# Altium PCB expansion.PcbDoc
Units mil, origin at the board's own origin, x right, y up, seen from the top; angles counter-clockwise.
Board outline 912.08 x 872.97 mil, 2 copper layers (Top Layer, Bottom Layer), stack 18.8 mil thick; 25 components, 8 nets, 152 pads, 0 vias.
Unrouted connection lines stored in the file: 114.
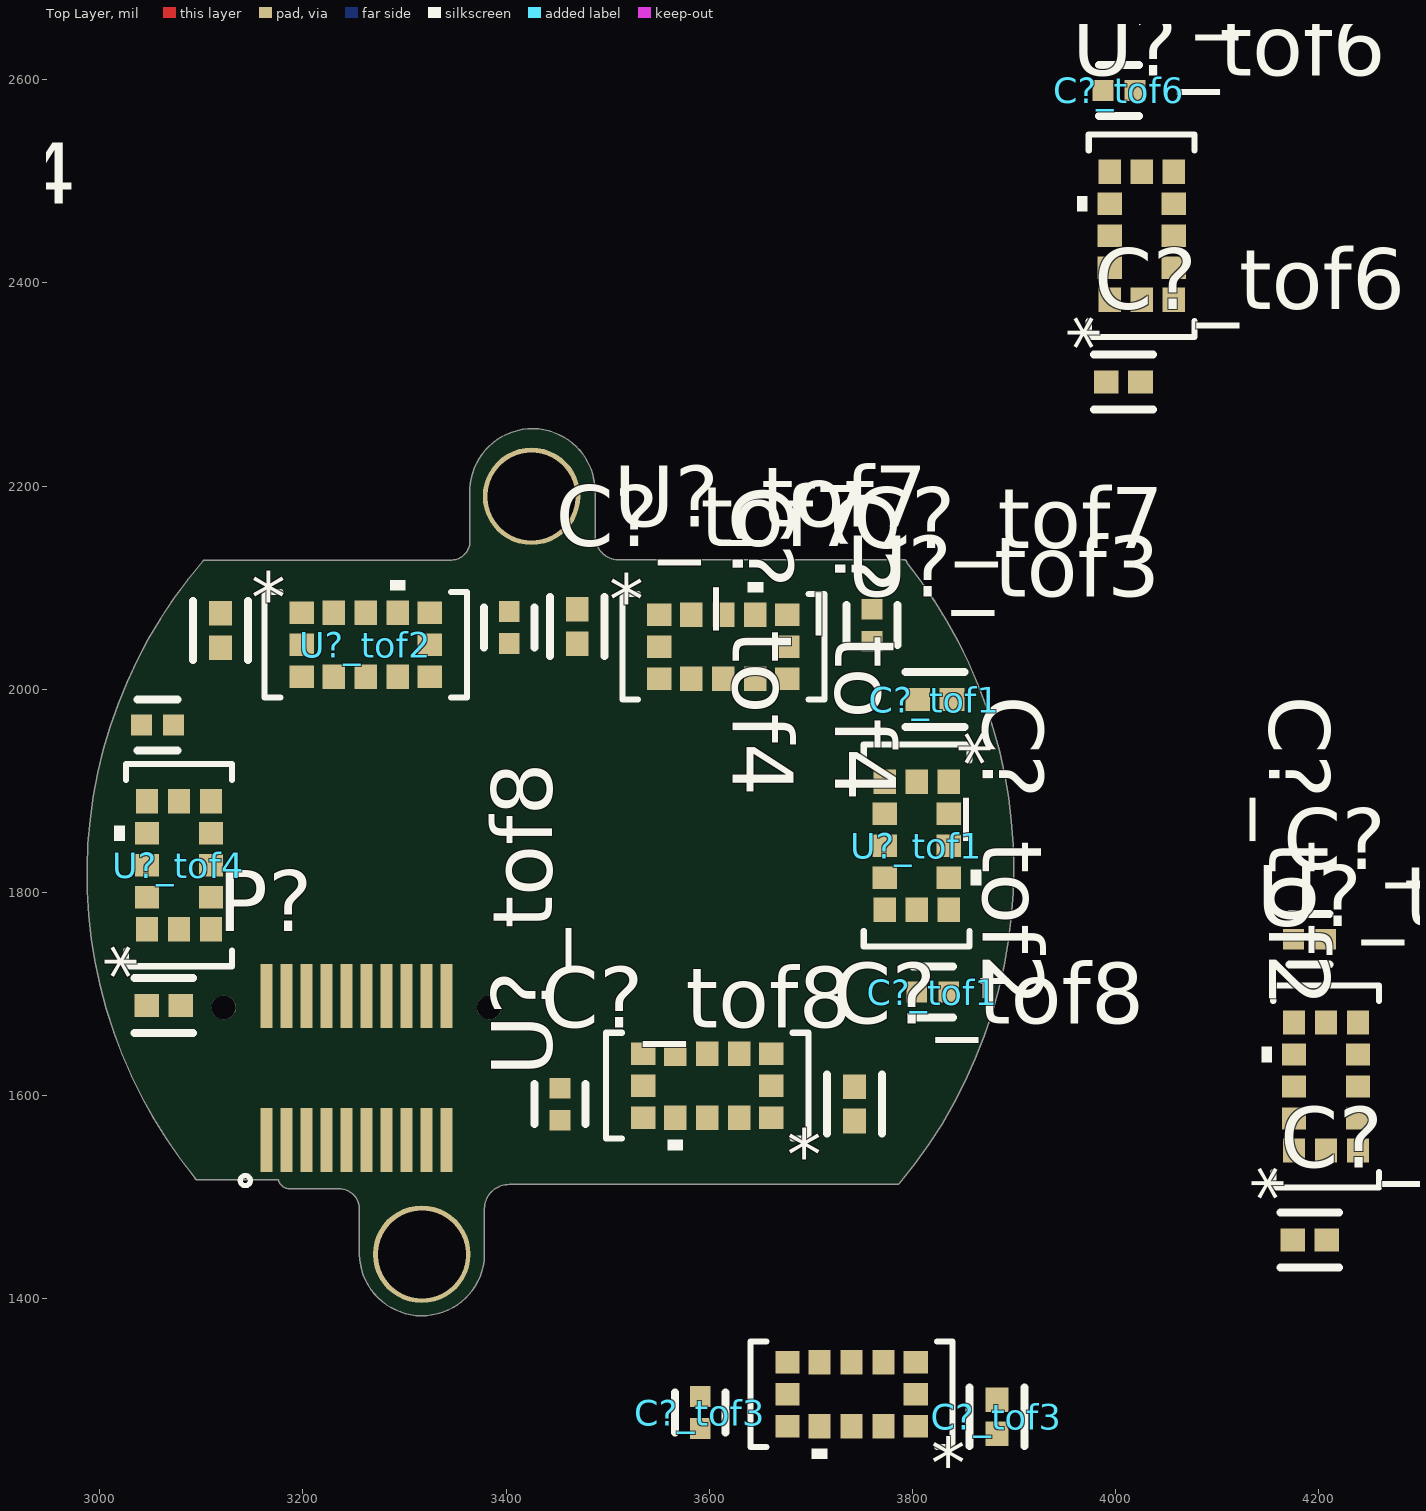
[diagram p0: Top Layer view]
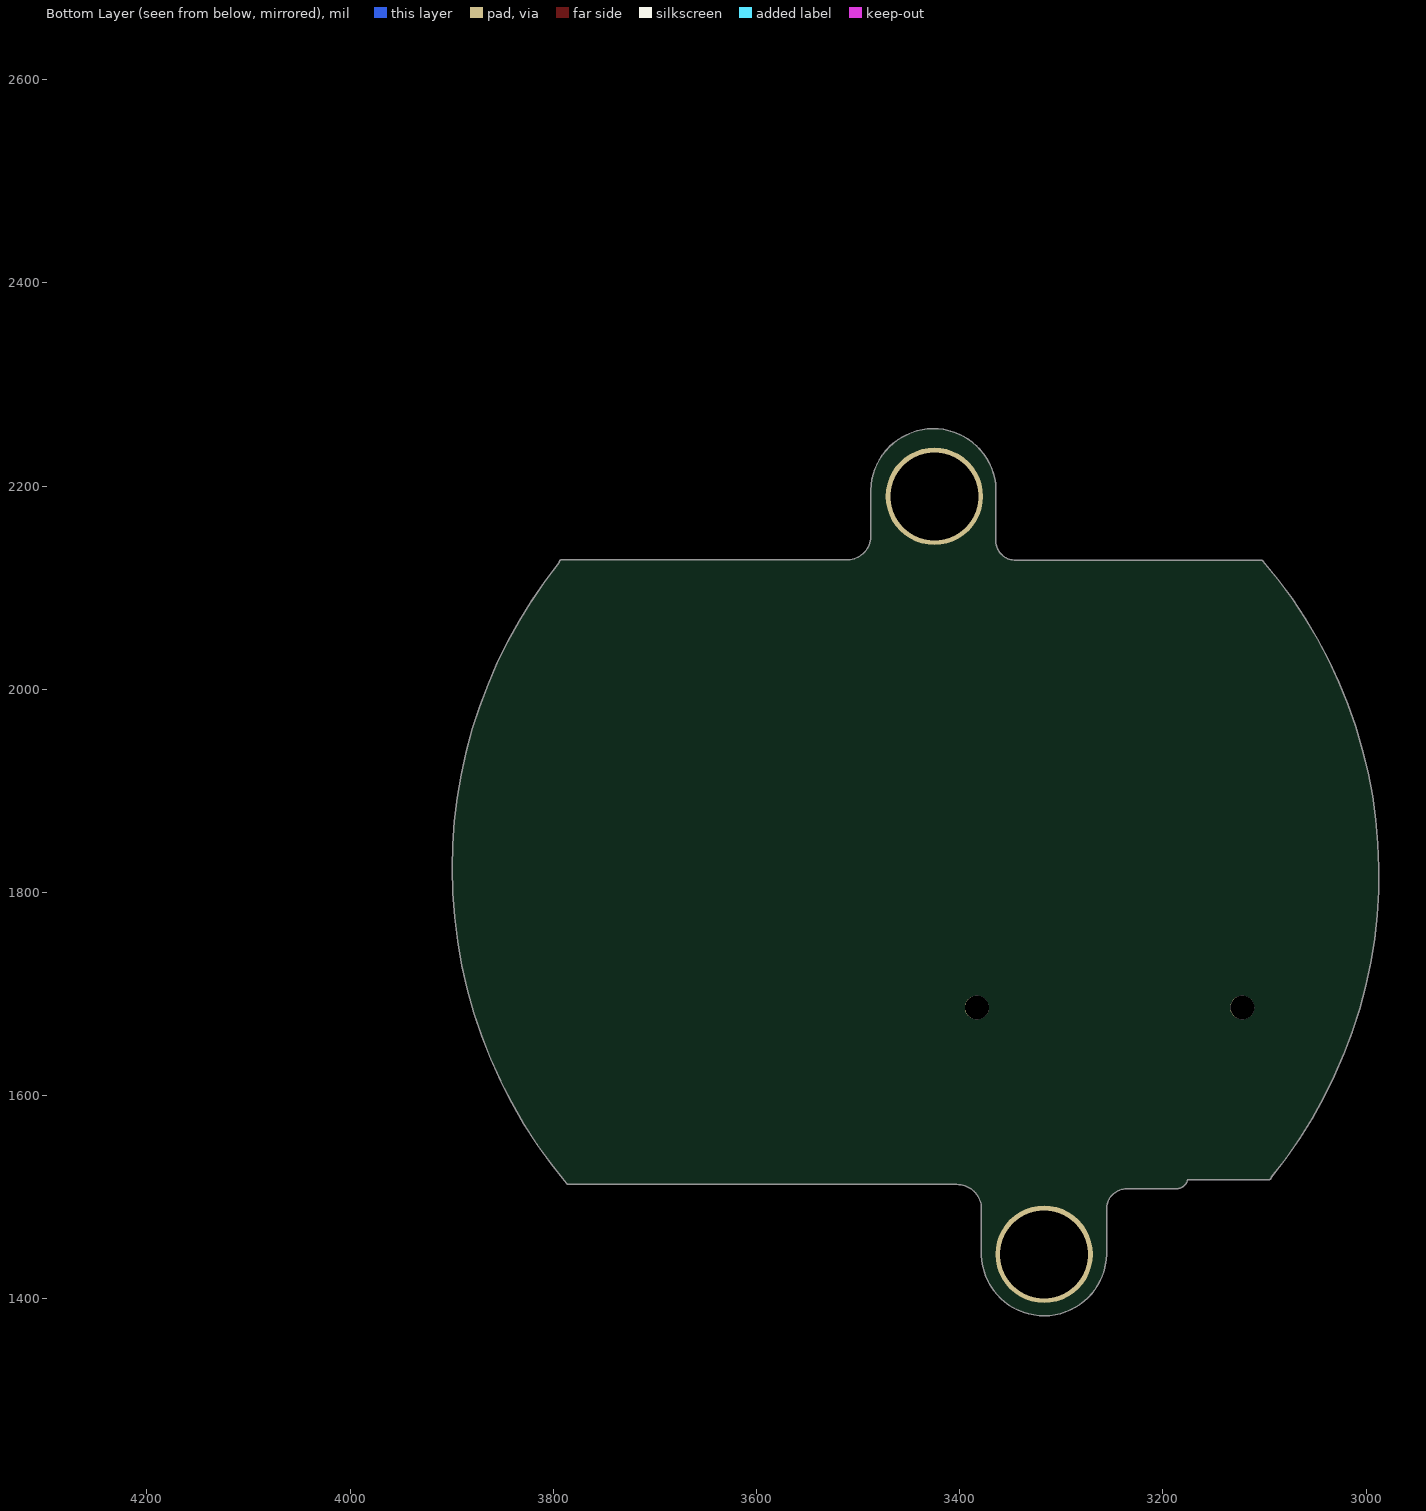
[diagram p1: Bottom Layer view, seen from below]

## Layer stack, top to bottom
Top Solder: solder mask 0.4, Solder Resist, Dk 3.5
Top Layer: signal copper 1.4
Dielectric 1: core 3, FR-4, Dk 4.2
Dielectric 3: prepreg 5, Dk 4.2
Dielectric 2: core 8, Dk 4.2
Bottom Layer: signal copper 1.4
Bottom Solder: solder mask 0.4, Solder Resist, Dk 3.5

## Board outline
3187,1508.48 3234,1508.48 ccw(c3234,1511) 3234.17,1508.49 cw(c3235.55,1488.45) 3255.59,1489.91 3255.59,1444 ccw(c3258.11,1444) 3255.6,1443.88 cw(c3317.16,1445.01) 3255.59,1444.02 cw(c3258.11,1444.06) 3255.59,1444.06 3255.6,1443.88 ccw(c3317.16,1445.01) 3378.69,1442.78 ccw(c3376.18,1443) 3378.7,1443 3378.7,1488.99 cw(c3402.69,1488.69) 3402.97,1512.68 ccw(c3403,1515.2) 3403,1512.68 3785,1512.68 ccw(c3785,1515.2) 3787.04,1513.73 ccw(c3785.23,1515.48) 3787.16,1513.86 ccw(c3416.39,1823.74) 3899.61,1823.74 ccw(c3416.39,1823.74) 3794.27,2124.92 ccw(c3791.76,2125) 3794.27,2125 ccw(c3791.76,2125) 3791.76,2127.51 3512,2127.51 ccw(c3512,2125) 3511.88,2127.51 cw(c3511.01,2150.99) 3487.53,2150.1 ccw(c3485.02,2150) 3487.51,2150.35 3487.51,2195 ccw(c3484.99,2195) 3487.46,2195.48 ccw(c3485,2196) 3487.51,2196 ccw(c3485,2196) 3487.51,2196.04 ccw(c3425.95,2195.05) 3364.42,2197.3 ccw(c3366.92,2197) 3364.41,2197 3364.41,2144.08 ccw(c3366.92,2144.08) 3364.43,2143.72 cw(c3345.4,2146.4) 3343.3,2127.3 cw(c3345.4,2146.4) 3343.28,2127.3 3343.3,2127.3 ccw(c3343,2124.8) 3343,2127.32 3103.61,2127.29 ccw(c3103.61,2124.78) 3101.71,2126.42 ccw(c3460.68,1818.11) 3093.33,1519.84 ccw(c3095.84,1520) 3095.84,1517.48 3175.76,1517.48 ccw(c3187,1520)

## Design rules (kind name [scope] priority, off if disabled: settings)
Clearance [All] p1: gap=5 ignorepadtopadclearanceinfootprint=FALSE except(0: Arc-Hole Track-Hole SMDPad-Hole THPad-Hole Via-Hole Fill-Hole Poly-Hole Region-Hole Text-Hole; 6: Track-SMDPad)
MinimumSolderMaskSliver [All] p1 off: minsoldermaskwidth=5
PolygonConnect [All] p1: connectstyle=Direct reliefconductorwidth=10 reliefentries=4 polygonreliefangle="90 Angle" airgapwidth=10
RoomDefinition tof6 [InComponentClass('tof6')] p1: confinementstyle=ConfineIn formatcopy=TRUE lockcomponents=FALSE outline 3941.49,2267.5 4124.49,2267.5 4124.49,2679.5 3941.49,2679.5
RoomDefinition tof7 [InComponentClass('tof7')] p2: confinementstyle=ConfineIn formatcopy=TRUE lockcomponents=FALSE outline 3398,2125.87 3398,1922.87 3846.87,1922.87 3846.87,2125.87
RoomDefinition tof8 [InComponentClass('tof8')] p3: confinementstyle=ConfineIn formatcopy=TRUE lockcomponents=FALSE outline 3792,1526 3792,1695 3365,1695 3365,1526
RoomDefinition tof5 [InComponentClass('tof5')] p4: confinementstyle=ConfineIn formatcopy=TRUE lockcomponents=FALSE outline 4123,1389 4313,1389 4313,1842.13 4123,1842.13
RoomDefinition tof4 [InComponentClass('tof4')] p5: confinementstyle=ConfineIn formatcopy=TRUE lockcomponents=FALSE outline 3003,1653 3165,1653 3165,2001 3003,2001
RoomDefinition tof3 [InComponentClass('tof3')] p6: confinementstyle=ConfineIn formatcopy=TRUE lockcomponents=FALSE outline 3922,1232.13 3922,1391.13 3561.75,1391.13 3561.75,1232.13
RoomDefinition tof2 [InComponentClass('tof2')] p7: confinementstyle=ConfineIn formatcopy=TRUE lockcomponents=FALSE outline 3074,2116 3074,1952 3484.87,1952 3484.87,2116
RoomDefinition tof1 [InComponentClass('tof1')] p8: confinementstyle=ConfineIn formatcopy=TRUE lockcomponents=FALSE outline 3876,2024 3712,2024 3712,1663 3876,1663
RoomDefinition expansion [InComponentClass('expansion')] p9: confinementstyle=ConfineIn formatcopy=TRUE lockcomponents=FALSE outline 0,0 2000,0 2000,1000 0,1000
RoutingVias [All] p1: holewidth=8 width=18 viastyle="Through Hole" minholewidth=8 minwidth=18 maxholewidth=28 maxwidth=50
SilkToSilkClearance [All] p1 off: silktosilkclearance=10
SilkToSolderMaskClearance [IsPad] p1 off: minsilkscreentomaskgap=10 clearancetoexposedcopper=TRUE
SolderMaskExpansion [All] p1: expansion=4 istentingtop=FALSE
Width [All] p1: maxlimit=50 minlimit=5 preferedwidth=5
27 further rules are at their usual default settings.

## Classes and differential pairs
component class tof8: C?_tof8 U?_tof8
component class tof7: C?_tof7 U?_tof7
component class tof6: C?_tof6 U?_tof6
component class tof5: C?_tof5 U?_tof5
channel class VL53L01: tof1 tof2 tof3 tof4 tof5 tof6 tof7 tof8
component class tof4: C?_tof4 U?_tof4
component class tof3: C?_tof3 U?_tof3
component class tof2: C?_tof2 U?_tof2
component class tof1: C?_tof1 U?_tof1
component class expansion: P? U?

## Components (designator, comment, footprint, x,y, rotation, side; value= is the part's Value field where it differs from the comment)
C?_tof1 "C0402C104K8PACTU" FP-C0402-BB-MFG 3820,1702 r180 top value="0.10 μF" (schematic designator C?)
C?_tof1 "GRM155R60J475ME47D" FP-GRM155-0_1-IPC_B 3822,1990 r180 top (schematic designator C?)
C?_tof2 "C0402C104K8PACTU" FP-C0402-BB-MFG 3403,2061 r270 top value="0.10 μF" (schematic designator C?)
C?_tof2 "GRM155R60J475ME47D" FP-GRM155-0_1-IPC_B 3119,2058 r270 top (schematic designator C?)
C?_tof3 "C0402C104K8PACTU" FP-C0402-BB-MFG 3591,1288.13 r90 top value="0.10 μF" (schematic designator C?)
C?_tof3 "GRM155R60J475ME47D" FP-GRM155-0_1-IPC_B 3883,1284.13 r90 top (schematic designator C?)
C?_tof4 "C0402C104K8PACTU" FP-C0402-BB-MFG 3057,1965 r0 top value="0.10 μF" (schematic designator C?)
C?_tof4 "GRM155R60J475ME47D" FP-GRM155-0_1-IPC_B 3063,1689 r0 top (schematic designator C?)
C?_tof5 "C0402C104K8PACTU" FP-C0402-BB-MFG 4190.75,1754 r0 top value="0.10 μF" (schematic designator C?)
C?_tof5 "GRM155R60J475ME47D" FP-GRM155-0_1-IPC_B 4191,1458 r0 top (schematic designator C?)
C?_tof6 "C0402C104K8PACTU" FP-C0402-BB-MFG 4003.24,2589.5 r0 top value="0.10 μF" (schematic designator C?)
C?_tof6 "GRM155R60J475ME47D" FP-GRM155-0_1-IPC_B 4007.49,2302.62 r0 top (schematic designator C?)
C?_tof7 "GRM155R60J475ME47D" FP-GRM155-0_1-IPC_B 3470,2061.87 r270 top (schematic designator C?)
C?_tof7 "C0402C104K8PACTU" FP-C0402-BB-MFG 3760,2063.12 r270 top value="0.10 μF" (schematic designator C?)
C?_tof8 "C0402C104K8PACTU" FP-C0402-BB-MFG 3453,1591.75 r90 top value="0.10 μF" (schematic designator C?)
C?_tof8 "GRM155R60J475ME47D" FP-GRM155-0_1-IPC_B 3743,1592 r90 top (schematic designator C?)
P? "CONN HEADER 20POS" "DF12 20 POS" 3311,1633 r0 top
U?_tof1 "VL53L1CBV0FY/1" QFN_BV0FY/1_STM-M 3804,1846.25 r270 top (schematic designator U?)
U?_tof2 "VL53L1CBV0FY/1" QFN_BV0FY/1_STM-M 3261.87,2044 r0 top (schematic designator U?)
U?_tof3 "VL53L1CBV0FY/1" QFN_BV0FY/1_STM-M 3740,1306.13 r180 top (schematic designator U?)
U?_tof4 "VL53L1CBV0FY/1" QFN_BV0FY/1_STM-M 3078,1827 r90 top (schematic designator U?)
U?_tof5 "VL53L1CBV0FY/1" QFN_BV0FY/1_STM-M 4207,1609.13 r90 top (schematic designator U?)
U?_tof6 "VL53L1CBV0FY/1" QFN_BV0FY/1_STM-M 4025.49,2446.5 r90 top (schematic designator U?)
U?_tof7 "VL53L1CBV0FY/1" QFN_BV0FY/1_STM-M 3613.87,2041.87 r0 top (schematic designator U?)
U?_tof8 "VL53L1CBV0FY/1" QFN_BV0FY/1_STM-M 3598,1610 r180 top (schematic designator U?)

## Footprints (in the part's own frame and the unit in brackets; to place one, negate y for a bottom-side part, rotate by r counter-clockwise, add the part's x,y. Pads: shape width x height; smd on the part's side, far side on the other; paste and mask are expansions set on the pad)
"DF12 20 POS" [mm]
  round 0.6 hole 0.6: 1(-4.801,1.366) 1(1.836,1.365)
  rect 0.3x1.6 smd mask+0.07: 1(-3.73,-1.947) 2(-3.73,1.653) 3(-3.229,-1.947) 4(-3.229,1.653) 5(-2.729,-1.947) 6(-2.729,1.653) 7(-2.23,-1.947) 8(-2.229,1.653) 9(-1.73,-1.947) 10(-1.73,1.653) 11(-1.23,-1.947) 12(-1.23,1.653) 13(-0.73,-1.947) 14(-0.73,1.653) 15(-0.236,-1.947) 16(-0.236,1.653) 17(0.264,-1.947) 18(0.265,1.653) 19(0.764,-1.947) 20(0.765,1.653)
  silkscreen extent -4.39,-3.09 -4.13,-2.83, body extent -5.12,-2.44 2.08,2.16, height 3.3
FP-C0402-BB-MFG [mm]
  rect 0.52x0.52 smd paste+0 mask+0: 1(-0.4,0) 2(0.4,0)
  silkscreen extent -0.5,-0.64 0.5,0.64, body extent -0.8,-0.4 0.8,0.4, height 0.25
FP-GRM155-0_1-IPC_B [mil]
  rect 24.23x22.54 smd paste+0 mask+0: 1(-16.87,0) 2(16.87,0)
  silkscreen extent -29,-27 29,27, body extent -35,-17 35,17, height 10
QFN_BV0FY/1_STM-M [mil]
  rect 24x22 smd paste+0 mask+0: 1(-63,31.5) 5(63,31.5) 6(63,0) 7(63,-31.5) 11(-63,-31.5) 12(-63,0)
  rect 22x24 smd paste+0 mask+0: 2(-31.5,31.49) 3(0,31.49) 4(31.5,31.49) 8(31.5,-31.49) 9(0,-31.49) 10(-31.5,-31.49)
  silkscreen extent -100,-52 100,63, body extent -94,-47 94,47, height 63

## Part data
C?_tof1 C?_tof2 C?_tof3 C?_tof4 C?_tof5 C?_tof6 C?_tof7 C?_tof8: library part CMP-2008-02046-2, "CAP CER 0.1UF 10V X5R 0402", Capacitance="0.10 μF", Manufacturer=Kemet, Package=C0402-BB, Temperature="-55°C to +125°C", Temperature Characteristic=X5R, Temperature Coefficient=15%, Temperature Range High=+125°C, Temperature Range Low=-55°C, Tolerance=0.1, Voltage Rating="10 V", Automotive=No, Category=Cap, ComponentLink2Description=Datasheet, ComponentLink2URL=https://content.kemet.com/datasheets/KEM_C1002_X7R_SMD.pdf, Device Class L1="Passive Components", Device Class L2=Capacitors, Device Class L3="Ceramic Capacitors", Digikey Description="CAP CER 0.1UF 10V X5R 0402", Height=0.55mm, Ipc Land Pattern Name=CAPC10050X50, Lead Free=Yes, Manufacturer Part Number=C0402C104K8PACTU, Material=Ceramic, Mouser Description="Capacitor 100 nF 10 VDC 0402", Octopart=https://octopart.com/c0402c104k8pactu-kemet-140039, RoHS=TRUE
C?_tof1 C?_tof2 C?_tof3 C?_tof4 C?_tof5 C?_tof6 C?_tof7 C?_tof8: library part CMP-2008-04549-2, "Chip Multilayer Ceramic Capacitors for General Purpose, 0402, 4.7uF, X5R, 15%, 20%, 6.3V", Capacitance=4.7uF, Case Code (Imperial)=0402, Case Code (Metric)=1005, Dielectric=X5R, Max Operating Temperature=85°C, Min Operating Temperature=-55°C, Package Quantity=10000, Tolerance=20%, Voltage=6.3V, Case/Package=0402, Contact Plating=Tin, Depth=0.5mm, Height=0.5mm, Lead Free="Lead Free", Length=1mm, Mount="Surface Mount", Packaging="Tape and Reel", REACH SVHC="No SVHC", Termination=SMD/SMT, Thickness=0.022inch, Voltage Rating=6.3V, Voltage Rating (DC)=6.3V, Weight=0.000212oz, Width=0.02inch
P?: digikey part number=H11743CT-ND, Manufacturer="Hirose Electric Co Ltd", Manufacturer Part Number=DF12D(4.0)-20DP-0.5V(81), Supplier 1=Digi-Key, Supplier Part Number 1=H11743CT-ND
U?_tof1 U?_tof2 U?_tof3 U?_tof4 U?_tof5 U?_tof6 U?_tof7 U?_tof8: "No Description Available", Mfr_Name=STMicroelectronics, Copyright="Copyright (C) 2022 Ultra Librarian. All rights reserved.", Manufacturer_Part_Number=VL53L1CBV0FY/1, RefDes=RefDes, Type=DEV

## Free pads (board coordinates)
  round 96 hole 86.61: 1(3317,1444) 1(3425,2190)

## Nets (pads, with @x,y where several pads share a name; then routed paths per layer and width w, separated by ;. In a path a pad name is that pad's centre, name@x,y a point inside that pad or via, vN(x,y) a via of type N, cw(c..) or ccw(c..) an arc to the next point about the centre after c; other vN are vias at no path point)
5V: P?.2
GND: C?_tof1.2 C?_tof2.2 C?_tof3.2 C?_tof4.2 C?_tof5.2 C?_tof6.2 C?_tof7.2 C?_tof8.2 P?.20 U?_tof1.2 U?_tof1.3 U?_tof1.4 U?_tof1.6 U?_tof1.12 U?_tof2.2 U?_tof2.3 U?_tof2.4 U?_tof2.6 U?_tof2.12 U?_tof3.2 U?_tof3.3 U?_tof3.4 U?_tof3.6 U?_tof3.12 U?_tof4.2 U?_tof4.3 U?_tof4.4 U?_tof4.6 U?_tof4.12 U?_tof5.2 U?_tof5.3 U?_tof5.4 U?_tof5.6 U?_tof5.12 U?_tof6.2 U?_tof6.3 U?_tof6.4 U?_tof6.6 U?_tof6.12 U?_tof7.2 U?_tof7.3 U?_tof7.4 U?_tof7.6 U?_tof7.12 U?_tof8.2 U?_tof8.3 U?_tof8.4 U?_tof8.6 U?_tof8.12
RESET: P?.1
SCL: P?.9 U?_tof1.10 U?_tof2.10 U?_tof3.10 U?_tof4.10 U?_tof5.10 U?_tof6.10 U?_tof7.10 U?_tof8.10
SDA: P?.7 U?_tof1.9 U?_tof2.9 U?_tof3.9 U?_tof4.9 U?_tof5.9 U?_tof6.9 U?_tof7.9 U?_tof8.9
SWCLK: P?.3
SWDIO: P?.5
VCC: C?_tof1.1 C?_tof2.1 C?_tof3.1 C?_tof4.1 C?_tof5.1 C?_tof6.1 C?_tof7.1 C?_tof8.1 P?.11 U?_tof1.1 U?_tof1.5 U?_tof1.11 U?_tof2.1 U?_tof2.5 U?_tof2.11 U?_tof3.1 U?_tof3.5 U?_tof3.11 U?_tof4.1 U?_tof4.5 U?_tof4.11 U?_tof5.1 U?_tof5.5 U?_tof5.11 U?_tof6.1 U?_tof6.5 U?_tof6.11 U?_tof7.1 U?_tof7.5 U?_tof7.11 U?_tof8.1 U?_tof8.5 U?_tof8.11
pads on no net: P?.4 P?.6 P?.8 P?.10 P?.12 P?.13 P?.14 P?.15 P?.16 P?.17 P?.18 P?.19 U?_tof1.7 U?_tof1.8 U?_tof2.7 U?_tof2.8 U?_tof3.7 U?_tof3.8 U?_tof4.7 U?_tof4.8 U?_tof5.7 U?_tof5.8 U?_tof6.7 U?_tof6.8 U?_tof7.7 U?_tof7.8 U?_tof8.7 U?_tof8.8

## Silkscreen, mask and mechanical layers (free items; w line width, h text height)
Mechanical 1:
  lines w4: 3095.84,1520 3178,1520 ccw(c3187,1520) 3187,1511 3234,1511 cw(c3235.55,1488.45) 3258.11,1490 3258.11,1444 ; 3095.84,1520.74 cw(c3460.68,1818.11) 3103.61,2124.78 3343,2124.8 ccw(c3345.4,2146.4) 3367,2144 ; 3258.11,1444.06 ccw(c3317.16,1445.01) 3376.18,1443.11 ; 3366.92,2144.08 3366.92,2197 ; 3366.93,2196.95 cw(c3425.95,2195.05) 3485,2196 ; 3376.18,1443 3376.18,1491 ; 3376.18,1489 cw(c3402.69,1488.69) 3403,1515.2 3658,1515.2 3785,1515.2 ; 3484.99,2195 3484.99,2150.02 ccw(c3511.01,2150.99) 3512,2125 3791.76,2125 ; 3785.23,1515.48 ccw(c3416.39,1823.74) 3791.76,2124.03
Mechanical 2:
  circle w12: c3814,2052 r5.1
  circle w12: c3463,1651 r5.1
  circle w12: c3427,1636 r5.1
  circle w12: c3014,1823 r5.1
  circle w12: c2751,2382 r5.1
  lines w7.87: 3410,1683 3440,1684 ; 3564,1293.13 3564,1321.13 ; 3044,1601 3044,1629 3063,1617 3044,1601 ; 3411,1664 3439,1664 3424,1679 3411,1664
  text "C6,C10,C17,C18" at 3615,2882 h30
  text "C6 0.1uF" at 3215,2779 h12
  text "R2 10k" at 3562,2776 h12
  text "C8 18pF" at 3173,2743 h12
  text "C10 0.1uF" at 3569,2740 h12
  text "C14 6pF" at 3638,2680 h12
  text "01 32Khz" at 3134,2656 h12
  text "U4 NRF24L" at 3802,2638 h12
  text "U1 ATSAMD21" at 3352,2619 h12
  text "02 16Mhz" at 3649,2602 h12
  text "C9 18pF" at 3126,2560 h12
  text "C15 6pF" at 3646,2523 h12
  text "B1 Balun" at 3807,2501 h12
  text "C19 2200pF" at 3617,2489 h12
  text "C16 2200pF" at 3750,2474 h12
  text "C17 0.1uF" at 3745,2463 h12 r90
  text "R6 22K" at 3935,2449 h12 r90
  text "R5 DNP" at 3772,2411 h12
  text "LED3 ORNG" at 3887,2411 h12
  text "U8 DRV8835" at 3180,2405 h12 r90
  text "R3 O" at 3875,2384 h12 r90
  text "R4 DNP" at 3770,2383 h12
  text "U9 MPU6050" at 3599,2374 h12
  text "LED1 BLUE" at 3090,2365 h12
  text "LED2 RED" at 3103,2329 h12
  text "R7 330" at 3225,2317 h12 r90
  text "A1 2.4GHz" at 3796,2311 h12
  text "P4 20Pos" at 3358,2302 h12
  text "C18 0.1uF" at 3612,2257 h12
  text "R16 4.7K" at 3553,2244 h12 r90
  text "C20 10000pF" at 3606,2220 h12
  text "R17 4.7K" at 3514,2212 h12
  text "C11 33nF" at 3692.87,2103.87 h12
Mechanical 3:
  text "RED MOTOR" at 3681,2822 h15 r90
  text "BLACK MOTOR" at 3735,2822 h15 r90
  text "R20 1K" at 3867,2768 h15
  text "C5 0.1uF" at 3546,2764 h15
  text "R13 50K" at 3393,2761 h15 r90
  text "P6" at 3286,2745 h15
  text "C23 4.7uF" at 3713,2724 h15 r90
  text "R10 50K" at 3534,2717 h15
  text "R12 200K" at 3651,2702 h15
  text "R11 20K" at 3647,2661 h15
  text "L1 Bead" at 3225,2659 h15
  text "U4 MCP73831T" at 3914,2650 h15
  text "R15 200K" at 3281,2612 h15 r90
  text "R18 4.99K" at 3826,2603 h15 r90
  text "C12 0.1uF" at 3195,2600 h15
  text "+++" at 3781,2592 h15 r90
  text "U10 MCP6422" at 3557,2571 h15
  text "C13 10uF" at 3757,2564 h15
  text "P3" at 3160,2499 h15
  text "P5" at 3942,2495 h15
  text "R14 20K" at 3471,2478 h15
  text "U1 3.3V MTR" at 3627,2433 h15
  text "U2 3.3 Circuit" at 3872,2429 h15
  text "C22 10uF" at 3333,2426 h15
  text "+++" at 3469,2393 h15 r90
  text "+++" at 3331,2380 h15
  text "C2 10uF" at 3447,2366 h15
  text "R8 330" at 3280,2325 h15
  text "RED MOTOR" at 2974,2277 h15
  text "C1 100uF" at 3351,2267 h15
  text "SW1" at 3682,2253 h15
  text "BLACK MOTOR" at 2960,2230 h15
Mechanical 4:
  lines w5: 2642,2348 2799,2349 ; 2671,2115 2799,2115 ; 2689,2153 2746,2152 2746,2280 2689,2279 ; 2806,2170 2807,2113 ; 2813,2288 2815,2185 ; 3005,1897 3004,1742 3134,1743 ; 3005,1899 3136,1898 ; 3103,2014 3103,2119 ; 3103,2123 3259,2124 3260,2015 ; 3116,1706 3118,1861 ; 3120,1925 3121,1868 ; 3132,1781 3133,1724 3259,1724 ; 3132,1782 3132,1908 ; 3138,1962 3012,1962 3011,1905 3139,1905 ; 3161,1959 3411,1960 ; 3180,1560 3180,1727 ; 3235,2067 3363,2067 ; 3250,1730 3393,1730 3393,1663 ; 3260,1560 3260,1721 ; 3260,1663 3259,1724 ; 3260,1781 3259,1724 ; 3267,1836 3395,1836 3394,1779 3268,1779 ; 3267,1849 3524,1848 3524,1955 ; 3348,2062 3349,2119 3475,2119 3476,2062 ; 3383,1511 3743,1513 ; 3383,1513 3381,1686 3738,1683 ; 3404,1802 3403,1814 3574,1814 3576,1700 3405,1700 3405,1804 ; 3445,1581 3615,1586 ; 3604,1358.13 3604,1330.13 3679,1330.13 3679,1356.13 3610,1356.13 ; 3632,1336.13 3765,1336.13 ; 3647,1918 3820,1916 ; 3650,2031 3819,2030 ; 3681,1250.13 3761,1250.13 ; 3702,1860 3576,1860 3575,1917 3703,1917 ; 3755,1805 3584,1804 3587,1697 3760,1696 ; 3756,1905 3887,1905 3887,1744 3759,1745 ; 3989.49,2505.5 3990.49,2562.5 ; 4042.49,2450.5 4047.49,2341.5 ; 4046.49,2390.5 4046.49,2546.5 ; 4106.49,2675.5 4107.49,2561.5 ; 3014,1914 3015,1971 3141,1971 3142,1914 3014,1914 ; 3148,1973 3205,1972 3205,2100 3148,2099 3148,1973 ; 3214,2006 3215,2063 3341,2063 3342,2006 3214,2006 ; 3334,1957 3335,2014 3461,2014 3462,1957 3334,1957 ; 3336,2010 3337,2067 3463,2067 3464,2010 3336,2010 ; 3592,1912 3649,1913 3649,2039 3592,2040 3592,1912 ; 3665,2063 3793,2063 3792,2120 3666,2120 3665,2063 ; 3985.49,2444.5 4042.49,2443.5 4042.49,2571.5 3985.49,2570.5 3985.49,2444.5
Mechanical 15:
  circle w10: c3445,1820 r472.44
  circle w3.94: c3314,1444 r69.88
  circle w3.94: c3425,2190 r69.88
  circle w5: c3425.98,2186.89 r39.37
  circle w5: c3317.13,1458.11 r39.37

## Text inside footprints (layer, text, board x,y; h text height)
U?_tof1: Top Overlay "*" at 3826.24,1958.75 h50 r270; Mechanical 13 "*" at 3826.24,1909.75 h50 r270
U?_tof2: Top Overlay "*" at 3149.37,2066.24 h50; Mechanical 13 "*" at 3198.37,2066.24 h50
U?_tof3: Top Overlay "*" at 3852.5,1283.88 h50 r180; Mechanical 13 "*" at 3803.5,1283.88 h50 r180
U?_tof4: Top Overlay "*" at 3055.76,1714.5 h50 r90; Mechanical 13 "*" at 3055.76,1763.5 h50 r90
U?_tof5: Top Overlay "*" at 4184.76,1496.63 h50 r90; Mechanical 13 "*" at 4184.76,1545.63 h50 r90
U?_tof6: Top Overlay "*" at 4003.25,2334 h50 r90; Mechanical 13 "*" at 4003.25,2383 h50 r90
U?_tof7: Top Overlay "*" at 3501.37,2064.12 h50; Mechanical 13 "*" at 3550.37,2064.12 h50
U?_tof8: Top Overlay "*" at 3710.5,1587.76 h50 r180; Mechanical 13 "*" at 3661.5,1587.76 h50 r180